# EAGLE board rc_filter_v2-ld50 (EAGLE 9.1.3), part 1 of 2
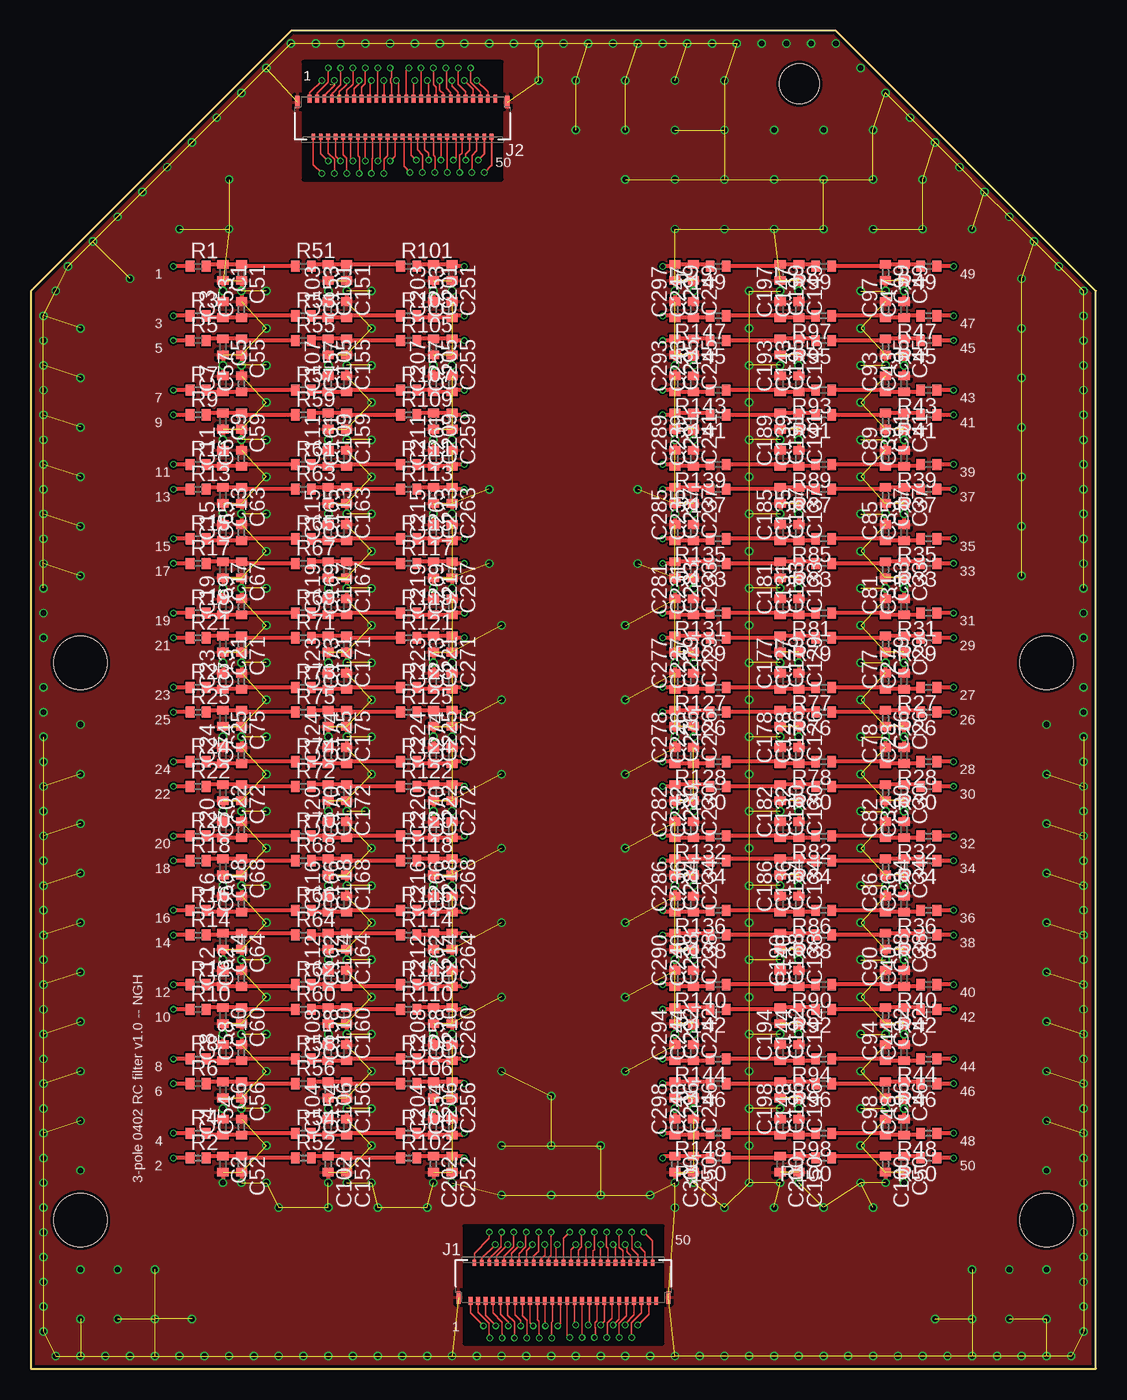
[diagram p0: board, top side]
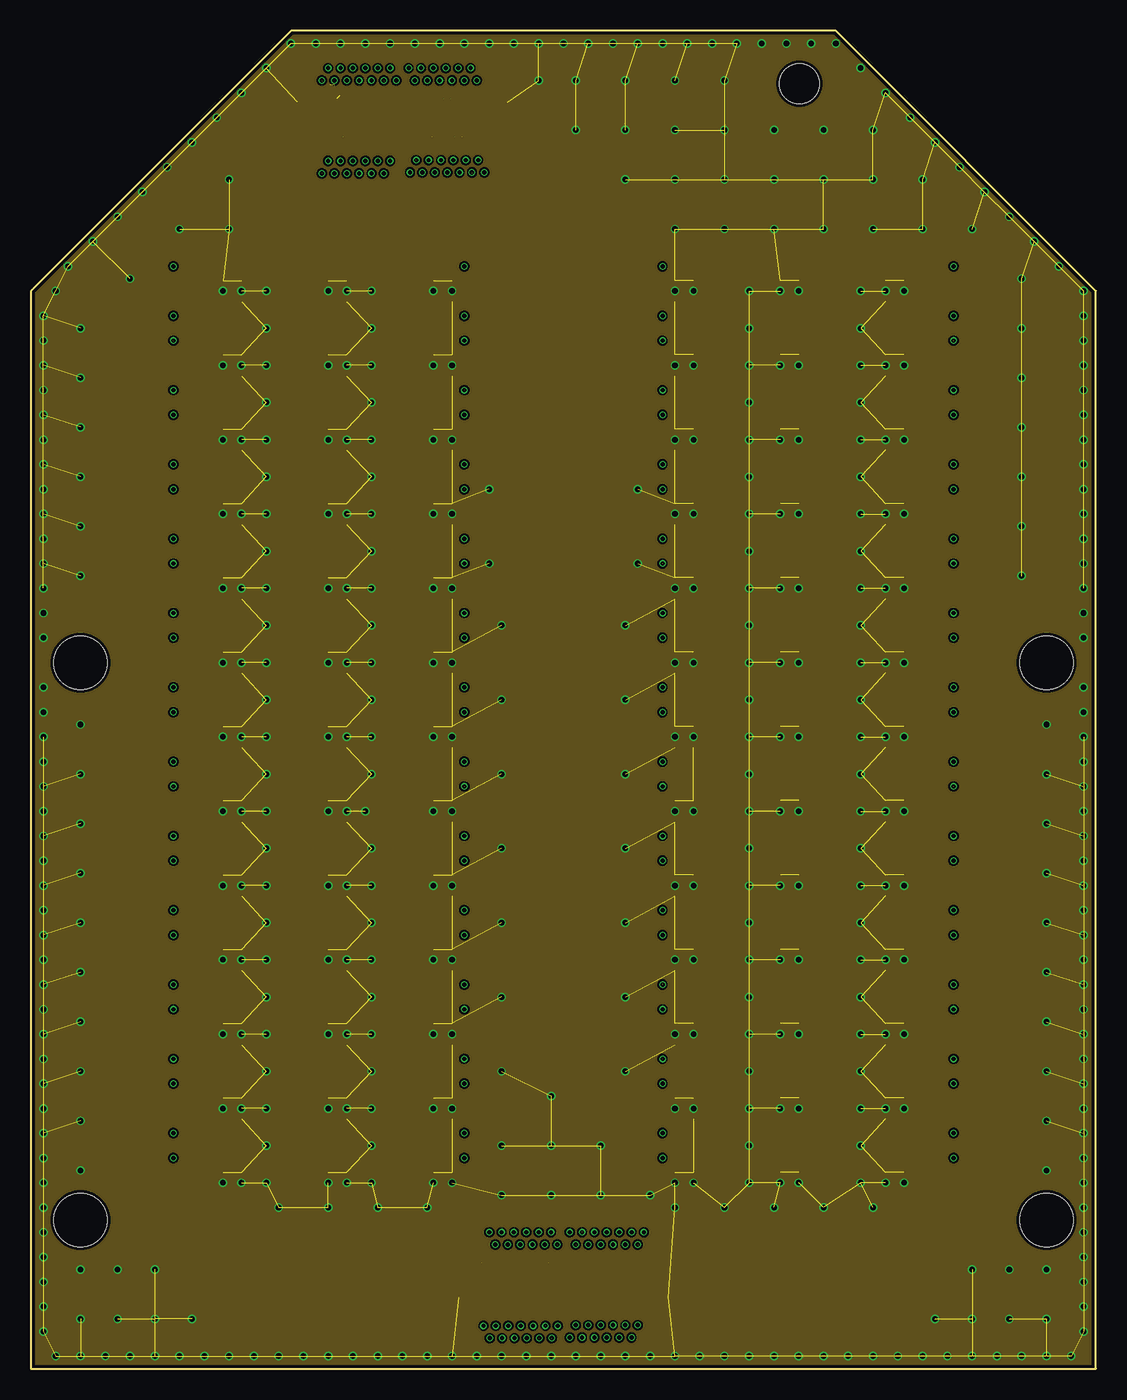
[diagram p1: board, inner layer Route2]
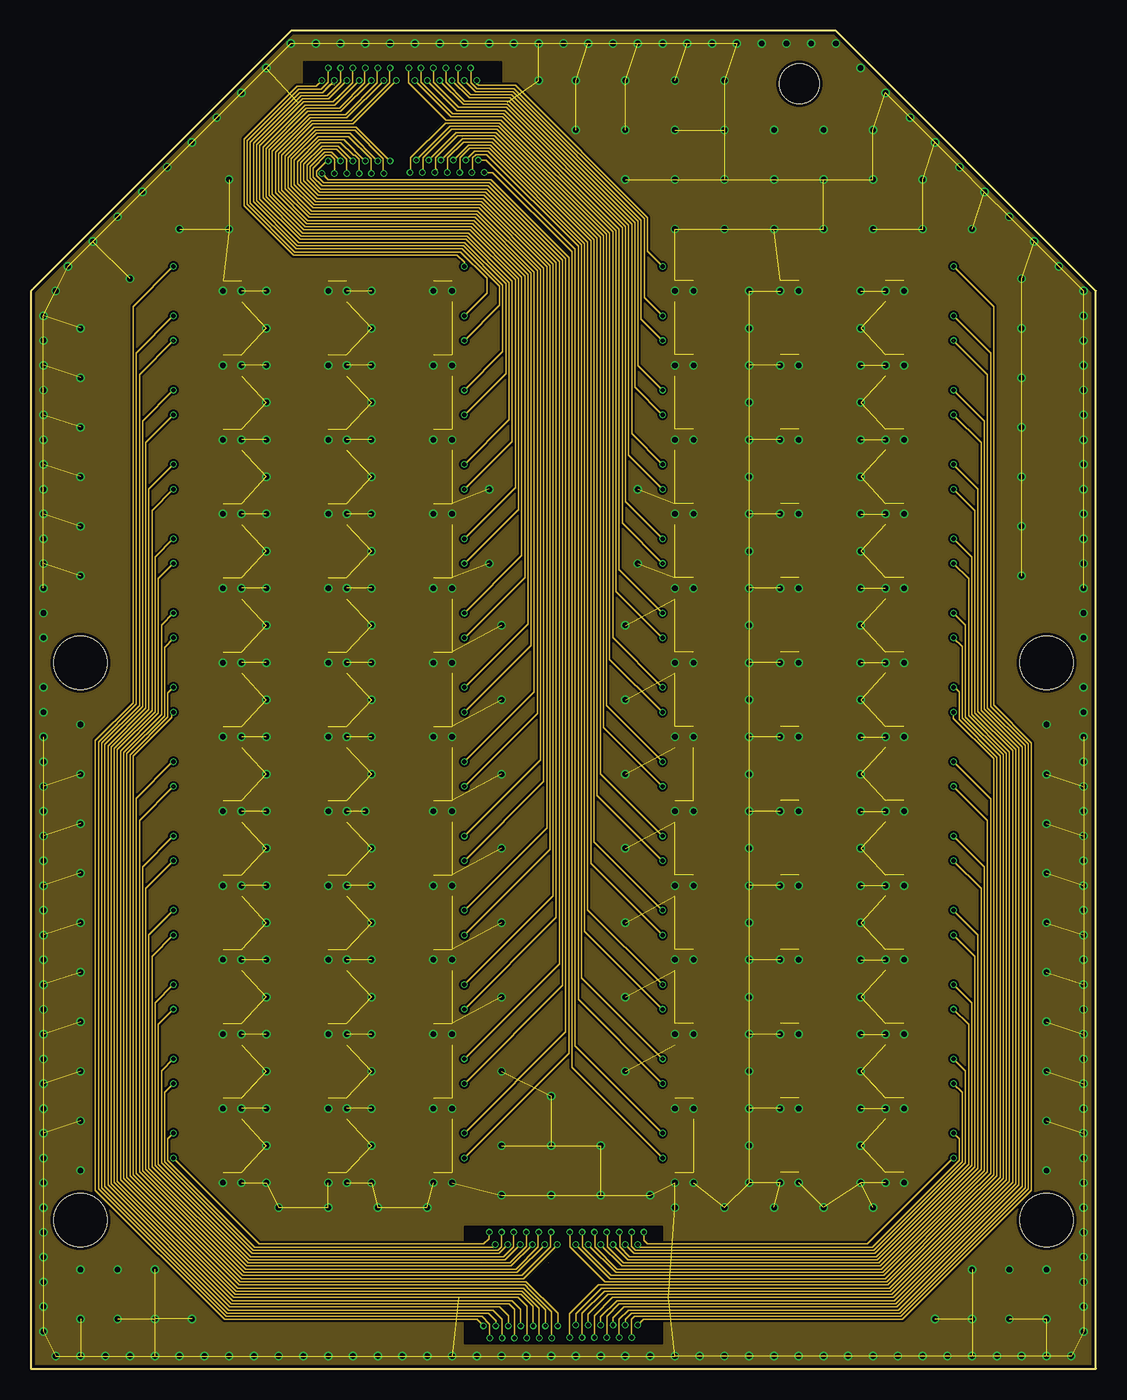
[diagram p2: board, inner layer Route15]
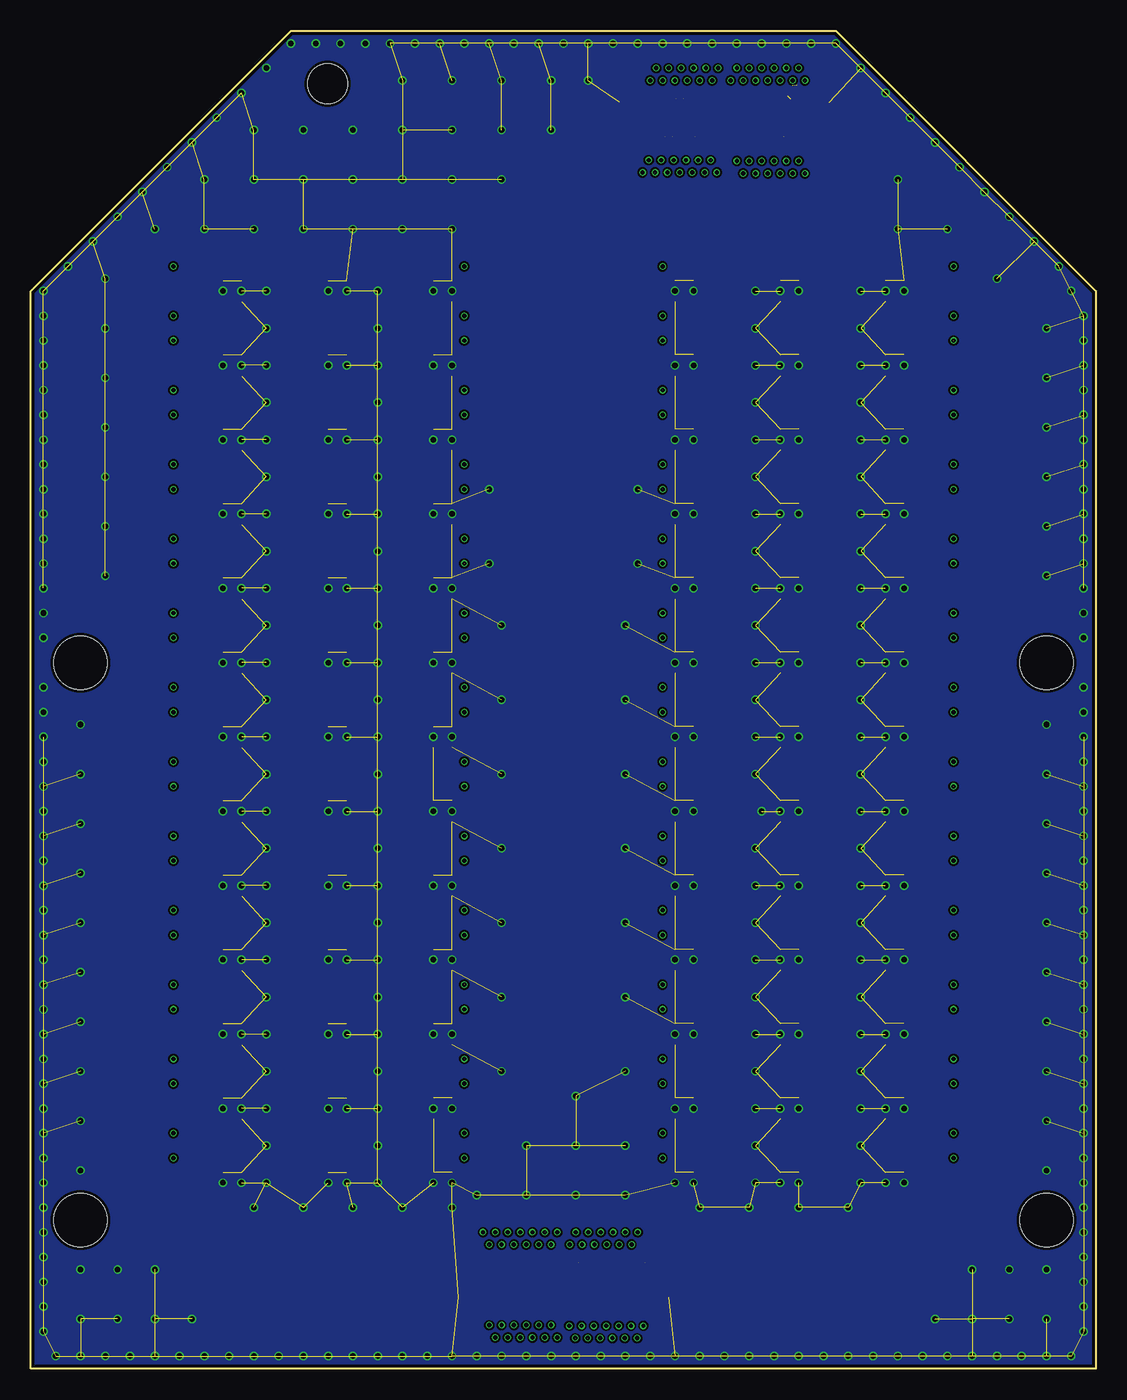
[diagram p3: board, bottom side, seen from below]

Size 86 x 108 mm. Coordinates in mm from the lower left corner, seen from the top.
Outline: 86,0 86,87 65,108 21,108 0,87 0,0 86,0
Copper layers ((1*2)+(15*16)): Top 0.048259375mm / dielectric 0.18288125mm / Route2 0.035559375mm / dielectric 39mil / Route15 0.035559375mm / dielectric 0.18288125mm / Bottom 0.048259375mm
Design rules "default *": minimum track width 5mil, minimum drill 5mil, track to track 5mil, track to pad 5mil, pad to pad 5mil, via to via 5mil, smd to smd 5mil, copper to edge 10mil, drill to drill 10mil, minimum pad ring 3mil, minimum via ring 3mil, stop-mask expansion 4mil, vias tented up to drill 16mil, thermal gap 10mil
Holes 3.2 mm at 62.05,103.75
Holes 4.3 mm at 4,12 4,57 82,57 82,12
tRestrict: area 35,2 to 51,11.5; area 22,96 to 38,105.5

## Footprints (pad centres in the part's own frame; a part is rotated, then mirrored left to right if it is on the bottom)
C0402 = smd 0.7 x 0.9: 1 -0.65,0; 2 0.65,0
MOLEX_502598-5193_0 = smd 0.3 x 0.67: 1 -7.5,-1.532; 3 -6.9,-1.532; 5 -6.3,-1.532; 7 -5.7,-1.532; 9 -5.1,-1.532; 11 -4.5,-1.532; 13 -3.9,-1.532; 15 -3.3,-1.532; 17 -2.7,-1.532; 19 -2.1,-1.532; 21 -1.5,-1.532; 23 -0.9,-1.532; 25 -0.3,-1.532; 27 0.3,-1.532; 29 0.9,-1.532; 31 1.5,-1.532; 33 2.1,-1.532; 35 2.7,-1.532; 37 3.3,-1.532; 39 3.9,-1.532; 41 4.5,-1.532; 43 5.1,-1.532; 45 5.7,-1.532; 47 6.3,-1.532; 49 6.9,-1.532; 51 7.5,-1.532 | smd 0.3 x 0.5: 2 -7.2,1.532; 4 -6.6,1.532; 6 -6,1.532; 8 -5.4,1.532; 10 -4.8,1.532; 12 -4.2,1.532; 14 -3.6,1.532; 16 -3,1.532; 18 -2.4,1.532; 20 -1.8,1.532; 22 -1.2,1.532; 24 -0.6,1.532; 26 0,1.532; 28 0.6,1.532; 30 1.2,1.532; 32 1.8,1.532; 34 2.4,1.532; 36 3,1.532; 38 3.6,1.532; 40 4.2,1.532; 42 4.8,1.532; 44 5.4,1.532; 46 6,1.532; 48 6.6,1.532; 50 7.2,1.532 | smd 0.35 x 1: MP1 -8.475,-1.267; MP2 8.475,-1.267
R0402 = smd 0.7 x 0.9: 1 -0.65,0; 2 0.65,0

## Placement (x,y rotation side)
C1  [C0402]  15.5,88.5 270 top
C2  [C0402]  15.5,16.5 270 top
C3  [C0402]  15.5,85.5 90 top
C4  [C0402]  15.5,19.5 90 top
C5  [C0402]  15.5,82.5 270 top
C6  [C0402]  15.5,22.5 270 top
C7  [C0402]  15.5,79.5 90 top
C8  [C0402]  15.5,25.5 90 top
C9  [C0402]  15.5,76.5 270 top
C10  [C0402]  15.5,28.5 270 top
C11  [C0402]  15.5,73.5 90 top
C12  [C0402]  15.5,31.5 90 top
C13  [C0402]  15.5,70.5 270 top
C14  [C0402]  15.5,34.5 270 top
C15  [C0402]  15.5,67.5 90 top
C16  [C0402]  15.5,37.5 90 top
C17  [C0402]  15.5,64.5 270 top
C18  [C0402]  15.5,40.5 270 top
C19  [C0402]  15.5,61.5 90 top
C20  [C0402]  15.5,43.5 90 top
C21  [C0402]  15.5,58.5 270 top
C22  [C0402]  15.5,46.5 270 top
C23  [C0402]  15.5,55.5 90 top
C24  [C0402]  15.5,49.5 90 top
C25  [C0402]  15.5,52.5 270 top
C26  [C0402]  70.5,52.5 270 top
C27  [C0402]  70.5,55.5 90 top
C28  [C0402]  70.5,49.5 90 top
C29  [C0402]  70.5,58.5 270 top
C30  [C0402]  70.5,46.5 270 top
C31  [C0402]  70.5,61.5 90 top
C32  [C0402]  70.5,43.5 90 top
C33  [C0402]  70.5,64.5 270 top
C34  [C0402]  70.5,40.5 270 top
C35  [C0402]  70.5,67.5 90 top
C36  [C0402]  70.5,37.5 90 top
C37  [C0402]  70.5,70.5 270 top
C38  [C0402]  70.5,34.5 270 top
C39  [C0402]  70.5,73.5 90 top
C40  [C0402]  70.5,31.5 90 top
C41  [C0402]  70.5,76.5 270 top
C42  [C0402]  70.5,28.5 270 top
C43  [C0402]  70.5,79.5 90 top
C44  [C0402]  70.5,25.5 90 top
C45  [C0402]  70.5,82.5 270 top
C46  [C0402]  70.5,22.5 270 top
C47  [C0402]  70.5,85.5 90 top
C48  [C0402]  70.5,19.5 90 top
C49  [C0402]  70.5,88.5 270 top
C50  [C0402]  70.5,16.5 270 top
C51  [C0402]  17,88.5 270 top
C52  [C0402]  17,16.5 270 top
C53  [C0402]  17,85.5 90 top
C54  [C0402]  17,19.5 90 top
C55  [C0402]  17,82.5 270 top
C56  [C0402]  17,22.5 270 top
C57  [C0402]  17,79.5 90 top
C58  [C0402]  17,25.5 90 top
C59  [C0402]  17,76.5 270 top
C60  [C0402]  17,28.5 270 top
C61  [C0402]  17,73.5 90 top
C62  [C0402]  17,31.5 90 top
C63  [C0402]  17,70.5 270 top
C64  [C0402]  17,34.5 270 top
C65  [C0402]  17,67.5 90 top
C66  [C0402]  17,37.5 90 top
C67  [C0402]  17,64.5 270 top
C68  [C0402]  17,40.5 270 top
C69  [C0402]  17,61.5 90 top
C70  [C0402]  17,43.5 90 top
C71  [C0402]  17,58.5 270 top
C72  [C0402]  17,46.5 270 top
C73  [C0402]  17,55.5 90 top
C74  [C0402]  17,49.5 90 top
C75  [C0402]  17,52.5 270 top
C76  [C0402]  69,52.5 270 top
C77  [C0402]  69,55.5 90 top
C78  [C0402]  69,49.5 90 top
C79  [C0402]  69,58.5 270 top
C80  [C0402]  69,46.5 270 top
C81  [C0402]  69,61.5 90 top
C82  [C0402]  69,43.5 90 top
C83  [C0402]  69,64.5 270 top
C84  [C0402]  69,40.5 270 top
C85  [C0402]  69,67.5 90 top
C86  [C0402]  69,37.5 90 top
C87  [C0402]  69,70.5 270 top
C88  [C0402]  69,34.5 270 top
C89  [C0402]  69,73.5 90 top
C90  [C0402]  69,31.5 90 top
C91  [C0402]  69,76.5 270 top
C92  [C0402]  69,28.5 270 top
C93  [C0402]  69,79.5 90 top
C94  [C0402]  69,25.5 90 top
C95  [C0402]  69,82.5 270 top
C96  [C0402]  69,22.5 270 top
C97  [C0402]  69,85.5 90 top
C98  [C0402]  69,19.5 90 top
C99  [C0402]  69,88.5 270 top
C100  [C0402]  69,16.5 270 top
C101  [C0402]  24,88.5 270 top
C102  [C0402]  24,16.5 270 top
C103  [C0402]  24,85.5 90 top
C104  [C0402]  24,19.5 90 top
C105  [C0402]  24,82.5 270 top
C106  [C0402]  24,22.5 270 top
C107  [C0402]  24,79.5 90 top
C108  [C0402]  24,25.5 90 top
C109  [C0402]  24,76.5 270 top
C110  [C0402]  24,28.5 270 top
C111  [C0402]  24,73.5 90 top
C112  [C0402]  24,31.5 90 top
C113  [C0402]  24,70.5 270 top
C114  [C0402]  24,34.5 270 top
C115  [C0402]  24,67.5 90 top
C116  [C0402]  24,37.5 90 top
C117  [C0402]  24,64.5 270 top
C118  [C0402]  24,40.5 270 top
C119  [C0402]  24,61.5 90 top
C120  [C0402]  24,43.5 90 top
C121  [C0402]  24,58.5 270 top
C122  [C0402]  24,46.5 270 top
C123  [C0402]  24,55.5 90 top
C124  [C0402]  24,49.5 90 top
C125  [C0402]  24,52.5 270 top
C126  [C0402]  62,52.5 270 top
C127  [C0402]  62,55.5 90 top
C128  [C0402]  62,49.5 90 top
C129  [C0402]  62,58.5 270 top
C130  [C0402]  62,46.5 270 top
C131  [C0402]  62,61.5 90 top
C132  [C0402]  62,43.5 90 top
C133  [C0402]  62,64.5 270 top
C134  [C0402]  62,40.5 270 top
C135  [C0402]  62,67.5 90 top
C136  [C0402]  62,37.5 90 top
C137  [C0402]  62,70.5 270 top
C138  [C0402]  62,34.5 270 top
C139  [C0402]  62,73.5 90 top
C140  [C0402]  62,31.5 90 top
C141  [C0402]  62,76.5 270 top
C142  [C0402]  62,28.5 270 top
C143  [C0402]  62,79.5 90 top
C144  [C0402]  62,25.5 90 top
C145  [C0402]  62,82.5 270 top
C146  [C0402]  62,22.5 270 top
C147  [C0402]  62,85.5 90 top
C148  [C0402]  62,19.5 90 top
C149  [C0402]  62,88.5 270 top
C150  [C0402]  62,16.5 270 top
C151  [C0402]  25.5,88.5 270 top
C152  [C0402]  25.5,16.5 270 top
C153  [C0402]  25.5,85.5 90 top
C154  [C0402]  25.5,19.5 90 top
C155  [C0402]  25.5,82.5 270 top
C156  [C0402]  25.5,22.5 270 top
C157  [C0402]  25.5,79.5 90 top
C158  [C0402]  25.5,25.5 90 top
C159  [C0402]  25.5,76.5 270 top
C160  [C0402]  25.5,28.5 270 top
C161  [C0402]  25.5,73.5 90 top
C162  [C0402]  25.5,31.5 90 top
C163  [C0402]  25.5,70.5 270 top
C164  [C0402]  25.5,34.5 270 top
C165  [C0402]  25.5,67.5 90 top
C166  [C0402]  25.5,37.5 90 top
C167  [C0402]  25.5,64.5 270 top
C168  [C0402]  25.5,40.5 270 top
C169  [C0402]  25.5,61.5 90 top
C170  [C0402]  25.5,43.5 90 top
C171  [C0402]  25.5,58.5 270 top
C172  [C0402]  25.5,46.5 270 top
C173  [C0402]  25.5,55.5 90 top
C174  [C0402]  25.5,49.5 90 top
C175  [C0402]  25.5,52.5 270 top
C176  [C0402]  60.5,52.5 270 top
C177  [C0402]  60.5,55.5 90 top
C178  [C0402]  60.5,49.5 90 top
C179  [C0402]  60.5,58.5 270 top
C180  [C0402]  60.5,46.5 270 top
C181  [C0402]  60.5,61.5 90 top
C182  [C0402]  60.5,43.5 90 top
C183  [C0402]  60.5,64.5 270 top
C184  [C0402]  60.5,40.5 270 top
C185  [C0402]  60.5,67.5 90 top
C186  [C0402]  60.5,37.5 90 top
C187  [C0402]  60.5,70.5 270 top
C188  [C0402]  60.5,34.5 270 top
C189  [C0402]  60.5,73.5 90 top
C190  [C0402]  60.5,31.5 90 top
C191  [C0402]  60.5,76.5 270 top
C192  [C0402]  60.5,28.5 270 top
C193  [C0402]  60.5,79.5 90 top
C194  [C0402]  60.5,25.5 90 top
C195  [C0402]  60.5,82.5 270 top
C196  [C0402]  60.5,22.5 270 top
C197  [C0402]  60.5,85.5 90 top
C198  [C0402]  60.5,19.5 90 top
C199  [C0402]  60.5,88.5 270 top
C200  [C0402]  60.5,16.5 270 top
C201  [C0402]  32.5,88.5 270 top
C202  [C0402]  32.5,16.5 270 top
C203  [C0402]  32.5,85.5 90 top
C204  [C0402]  32.5,19.5 90 top
C205  [C0402]  32.5,82.5 270 top
C206  [C0402]  32.5,22.5 270 top
C207  [C0402]  32.5,79.5 90 top
C208  [C0402]  32.5,25.5 90 top
C209  [C0402]  32.5,76.5 270 top
C210  [C0402]  32.5,28.5 270 top
C211  [C0402]  32.5,73.5 90 top
C212  [C0402]  32.5,31.5 90 top
C213  [C0402]  32.5,70.5 270 top
C214  [C0402]  32.5,34.5 270 top
C215  [C0402]  32.5,67.5 90 top
C216  [C0402]  32.5,37.5 90 top
C217  [C0402]  32.5,64.5 270 top
C218  [C0402]  32.5,40.5 270 top
C219  [C0402]  32.5,61.5 90 top
C220  [C0402]  32.5,43.5 90 top
C221  [C0402]  32.5,58.5 270 top
C222  [C0402]  32.5,46.5 270 top
C223  [C0402]  32.5,55.5 90 top
C224  [C0402]  32.5,49.5 90 top
C225  [C0402]  32.5,52.5 270 top
C226  [C0402]  53.5,52.5 270 top
C227  [C0402]  53.5,55.5 90 top
C228  [C0402]  53.5,49.5 90 top
C229  [C0402]  53.5,58.5 270 top
C230  [C0402]  53.5,46.5 270 top
C231  [C0402]  53.5,61.5 90 top
C232  [C0402]  53.5,43.5 90 top
C233  [C0402]  53.5,64.5 270 top
C234  [C0402]  53.5,40.5 270 top
C235  [C0402]  53.5,67.5 90 top
C236  [C0402]  53.5,37.5 90 top
C237  [C0402]  53.5,70.5 270 top
C238  [C0402]  53.5,34.5 270 top
C239  [C0402]  53.5,73.5 90 top
C240  [C0402]  53.5,31.5 90 top
C241  [C0402]  53.5,76.5 270 top
C242  [C0402]  53.5,28.5 270 top
C243  [C0402]  53.5,79.5 90 top
C244  [C0402]  53.5,25.5 90 top
C245  [C0402]  53.5,82.5 270 top
C246  [C0402]  53.5,22.5 270 top
C247  [C0402]  53.5,85.5 90 top
C248  [C0402]  53.5,19.5 90 top
C249  [C0402]  53.5,88.5 270 top
C250  [C0402]  53.5,16.5 270 top
C251  [C0402]  34,88.5 270 top
C252  [C0402]  34,16.5 270 top
C253  [C0402]  34,85.5 90 top
C254  [C0402]  34,19.5 90 top
C255  [C0402]  34,82.5 270 top
C256  [C0402]  34,22.5 270 top
C257  [C0402]  34,79.5 90 top
C258  [C0402]  34,25.5 90 top
C259  [C0402]  34,76.5 270 top
C260  [C0402]  34,28.5 270 top
C261  [C0402]  34,73.5 90 top
C262  [C0402]  34,31.5 90 top
C263  [C0402]  34,70.5 270 top
C264  [C0402]  34,34.5 270 top
C265  [C0402]  34,67.5 90 top
C266  [C0402]  34,37.5 90 top
C267  [C0402]  34,64.5 270 top
C268  [C0402]  34,40.5 270 top
C269  [C0402]  34,61.5 90 top
C270  [C0402]  34,43.5 90 top
C271  [C0402]  34,58.5 270 top
C272  [C0402]  34,46.5 270 top
C273  [C0402]  34,55.5 90 top
C274  [C0402]  34,49.5 90 top
C275  [C0402]  34,52.5 270 top
C276  [C0402]  52,52.5 270 top
C277  [C0402]  52,55.5 90 top
C278  [C0402]  52,49.5 90 top
C279  [C0402]  52,58.5 270 top
C280  [C0402]  52,46.5 270 top
C281  [C0402]  52,61.5 90 top
C282  [C0402]  52,43.5 90 top
C283  [C0402]  52,64.5 270 top
C284  [C0402]  52,40.5 270 top
C285  [C0402]  52,67.5 90 top
C286  [C0402]  52,37.5 90 top
C287  [C0402]  52,70.5 270 top
C288  [C0402]  52,34.5 270 top
C289  [C0402]  52,73.5 90 top
C290  [C0402]  52,31.5 90 top
C291  [C0402]  52,76.5 270 top
C292  [C0402]  52,28.5 270 top
C293  [C0402]  52,79.5 90 top
C294  [C0402]  52,25.5 90 top
C295  [C0402]  52,82.5 270 top
C296  [C0402]  52,22.5 270 top
C297  [C0402]  52,85.5 90 top
C298  [C0402]  52,19.5 90 top
C299  [C0402]  52,88.5 270 top
C300  [C0402]  52,16.5 270 top
J1  MOLEX_502598-5193MOLEX_502598-5193_0_0  [MOLEX_502598-5193_0]  43,7 0 top
J2  MOLEX_502598-5193MOLEX_502598-5193_0_0  [MOLEX_502598-5193_0]  30,101 180 top
R1  [R0402]  13.5,89 0 top
R2  [R0402]  13.5,17 0 top
R3  [R0402]  13.5,85 0 top
R4  [R0402]  13.5,19 0 top
R5  [R0402]  13.5,83 0 top
R6  [R0402]  13.5,23 0 top
R7  [R0402]  13.5,79 0 top
R8  [R0402]  13.5,25 0 top
R9  [R0402]  13.5,77 0 top
R10  [R0402]  13.5,29 0 top
R11  [R0402]  13.5,73 0 top
R12  [R0402]  13.5,31 0 top
R13  [R0402]  13.5,71 0 top
R14  [R0402]  13.5,35 0 top
R15  [R0402]  13.5,67 0 top
R16  [R0402]  13.5,37 0 top
R17  [R0402]  13.5,65 0 top
R18  [R0402]  13.5,41 0 top
R19  [R0402]  13.5,61 0 top
R20  [R0402]  13.5,43 0 top
R21  [R0402]  13.5,59 0 top
R22  [R0402]  13.5,47 0 top
R23  [R0402]  13.5,55 0 top
R24  [R0402]  13.5,49 0 top
R25  [R0402]  13.5,53 0 top
R26  [R0402]  72.5,53 180 top
R27  [R0402]  72.5,55 180 top
R28  [R0402]  72.5,49 180 top
R29  [R0402]  72.5,59 180 top
R30  [R0402]  72.5,47 180 top
R31  [R0402]  72.5,61 180 top
R32  [R0402]  72.5,43 180 top
R33  [R0402]  72.5,65 180 top
R34  [R0402]  72.5,41 180 top
R35  [R0402]  72.5,67 180 top
R36  [R0402]  72.5,37 180 top
R37  [R0402]  72.5,71 180 top
R38  [R0402]  72.5,35 180 top
R39  [R0402]  72.5,73 180 top
R40  [R0402]  72.5,31 180 top
R41  [R0402]  72.5,77 180 top
R42  [R0402]  72.5,29 180 top
R43  [R0402]  72.5,79 180 top
R44  [R0402]  72.5,25 180 top
R45  [R0402]  72.5,83 180 top
R46  [R0402]  72.5,23 180 top
R47  [R0402]  72.5,85 180 top
R48  [R0402]  72.5,19 180 top
R49  [R0402]  72.5,89 180 top
R50  [R0402]  72.5,17 180 top
R51  [R0402]  22,89 0 top
R52  [R0402]  22,17 0 top
R53  [R0402]  22,85 0 top
R54  [R0402]  22,19 0 top
R55  [R0402]  22,83 0 top
R56  [R0402]  22,23 0 top
R57  [R0402]  22,79 0 top
R58  [R0402]  22,25 0 top
R59  [R0402]  22,77 0 top
R60  [R0402]  22,29 0 top
R61  [R0402]  22,73 0 top
R62  [R0402]  22,31 0 top
R63  [R0402]  22,71 0 top
R64  [R0402]  22,35 0 top
R65  [R0402]  22,67 0 top
R66  [R0402]  22,37 0 top
R67  [R0402]  22,65 0 top
R68  [R0402]  22,41 0 top
R69  [R0402]  22,61 0 top
R70  [R0402]  22,43 0 top
R71  [R0402]  22,59 0 top
R72  [R0402]  22,47 0 top
R73  [R0402]  22,55 0 top
R74  [R0402]  22,49 0 top
R75  [R0402]  22,53 0 top
R76  [R0402]  64,53 180 top
R77  [R0402]  64,55 180 top
R78  [R0402]  64,49 180 top
R79  [R0402]  64,59 180 top
R80  [R0402]  64,47 180 top
R81  [R0402]  64,61 180 top
R82  [R0402]  64,43 180 top
R83  [R0402]  64,65 180 top
R84  [R0402]  64,41 180 top
R85  [R0402]  64,67 180 top
R86  [R0402]  64,37 180 top
R87  [R0402]  64,71 180 top
R88  [R0402]  64,35 180 top
R89  [R0402]  64,73 180 top
R90  [R0402]  64,31 180 top
R91  [R0402]  64,77 180 top
R92  [R0402]  64,29 180 top
R93  [R0402]  64,79 180 top
R94  [R0402]  64,25 180 top
R95  [R0402]  64,83 180 top
R96  [R0402]  64,23 180 top
R97  [R0402]  64,85 180 top
R98  [R0402]  64,19 180 top
R99  [R0402]  64,89 180 top
R100  [R0402]  64,17 180 top
R101  [R0402]  30.5,89 0 top
R102  [R0402]  30.5,17 0 top
R103  [R0402]  30.5,85 0 top
R104  [R0402]  30.5,19 0 top
R105  [R0402]  30.5,83 0 top
R106  [R0402]  30.5,23 0 top
R107  [R0402]  30.5,79 0 top
R108  [R0402]  30.5,25 0 top
R109  [R0402]  30.5,77 0 top
R110  [R0402]  30.5,29 0 top
R111  [R0402]  30.5,73 0 top
R112  [R0402]  30.5,31 0 top
R113  [R0402]  30.5,71 0 top
R114  [R0402]  30.5,35 0 top
R115  [R0402]  30.5,67 0 top
R116  [R0402]  30.5,37 0 top
R117  [R0402]  30.5,65 0 top
R118  [R0402]  30.5,41 0 top
R119  [R0402]  30.5,61 0 top
R120  [R0402]  30.5,43 0 top
R121  [R0402]  30.5,59 0 top
R122  [R0402]  30.5,47 0 top
R123  [R0402]  30.5,55 0 top
R124  [R0402]  30.5,49 0 top
R125  [R0402]  30.5,53 0 top
R126  [R0402]  55.5,53 180 top
R127  [R0402]  55.5,55 180 top
R128  [R0402]  55.5,49 180 top
R129  [R0402]  55.5,59 180 top
R130  [R0402]  55.5,47 180 top
R131  [R0402]  55.5,61 180 top
R132  [R0402]  55.5,43 180 top
R133  [R0402]  55.5,65 180 top
R134  [R0402]  55.5,41 180 top
R135  [R0402]  55.5,67 180 top
R136  [R0402]  55.5,37 180 top
R137  [R0402]  55.5,71 180 top
R138  [R0402]  55.5,35 180 top
R139  [R0402]  55.5,73 180 top
R140  [R0402]  55.5,31 180 top
R141  [R0402]  55.5,77 180 top
R142  [R0402]  55.5,29 180 top
R143  [R0402]  55.5,79 180 top
R144  [R0402]  55.5,25 180 top
R145  [R0402]  55.5,83 180 top
R146  [R0402]  55.5,23 180 top
R147  [R0402]  55.5,85 180 top
R148  [R0402]  55.5,19 180 top
R149  [R0402]  55.5,89 180 top
R150  [R0402]  55.5,17 180 top

## Library data of the parts
C1-C300 R1-R150 = resistor
J1 J2 = Molex - 502598-5193; CIIVA_IDS: 8412513; CIRCUITS_LOADED: 51; COMPONENT_LINK_1_DESCRIPTION: Manufacturer URL; COMPONENT_LINK_1_URL: http://www.molex.com/molex/index.jsp; COMPONENT_LINK_3_DESCRIPTION: Package Specification; COMPONENT_LINK_3_URL: http://www.molex.com/pdm_docs/sd/5025985193_sd.pdf; CONTACT_POSITION: Dual; CURRENT_MAX_PER_CONTACT: 0.2A; DATASHEET: http://www.molex.com/webdocs/datasheets/pdf/en-us/5025985193_FFC_FPC_CONNECTORS.pdf; DURABILITY_MATING_CYCLES_MAX: 10; ENTRY_ANGLE: 90degrees Angle; FOOTPRINT_VARIANT_NAME_0: Manufacturer Recommended; IMPORTED: yes; IMPORTED_FROM: vault; IMPORT_TS: 1521860080; MATED_HEIGHT: 1.15mm; MATERIAL___METAL: Copper Alloy, Phosphor Bronze; MATERIAL___PLATING_MATING: Gold; MATERIAL___PLATING_TERMINATION: Gold, Tin; MF: Molex; MOUNTING_TECHNOLOGY: Surface Mount; MPN: 502598-5193; NUMBER_OF_ROWS: 1; ORIENTATION: Right Angle; PACKAGE: 502598-5193; PACKAGE_DESCRIPTION: 51-Lead FPC Connector, Pitch 0.3 mm; PACKAGE_VERSION: Rev. B, 08/2013; PACKING: Tape and Reel; PCB_LOCATOR: No; PCB_RETENTION: Yes; PITCH___MATING_INTERFACE: 0.30mm; POLARIZED_TO_PCB: Yes; PREFIX: J; RELEASE_DATE: 1411372322; ROHS: Yes; STACKABLE: No; VAULT_GUID: 79943B7E-3FDB-4B6C-B1B1-74E826A886CC; VAULT_REVISION: 2B392736-9C86-4257-9195-559BF0CEA94B; VOLTAGE_MAX: 50V AC (RMS)/DC

## Nets
F1: J1.1 R1.1
F2: J1.2 R2.1
F3: J1.3 R3.1
F4: J1.4 R4.1
F5: J1.5 R5.1
F6: J1.6 R6.1
F7: J1.7 R7.1
F8: J1.8 R8.1
F9: J1.9 R9.1
F10: J1.10 R10.1
F11: J1.11 R11.1
F12: J1.12 R12.1
F13: J1.13 R13.1
F14: J1.14 R14.1
F15: J1.15 R15.1
F16: J1.16 R16.1
F17: J1.17 R17.1
F18: J1.18 R18.1
F19: J1.19 R19.1
F20: J1.20 R20.1
F21: J1.21 R21.1
F22: J1.22 R22.1
F23: J1.23 R23.1
F24: J1.24 R24.1
F25: J1.25 R25.1
F26: J1.26 R26.1
F27: J1.27 R27.1
F28: J1.28 R28.1
F29: J1.29 R29.1
F30: J1.30 R30.1
F31: J1.31 R31.1
F32: J1.32 R32.1
F33: J1.33 R33.1
F34: J1.34 R34.1
F35: J1.35 R35.1
F36: J1.36 R36.1
F37: J1.37 R37.1
F38: J1.38 R38.1
F39: J1.39 R39.1
F40: J1.40 R40.1
F41: J1.41 R41.1
F42: J1.42 R42.1
F43: J1.43 R43.1
F44: J1.44 R44.1
F45: J1.45 R45.1
F46: J1.46 R46.1
F47: J1.47 R47.1
F48: J1.48 R48.1
F49: J1.49 R49.1
F50: J1.50 R50.1
G1: C201.1 C251.1 J2.51 R101.2
G2: C202.1 C252.1 J2.50 R102.2
G3: C203.1 C253.1 J2.49 R103.2
G4: C204.1 C254.1 J2.48 R104.2
G5: C205.1 C255.1 J2.47 R105.2
G6: C206.1 C256.1 J2.46 R106.2
G7: C207.1 C257.1 J2.45 R107.2
G8: C208.1 C258.1 J2.44 R108.2
G9: C209.1 C259.1 J2.43 R109.2
G10: C210.1 C260.1 J2.42 R110.2
G11: C211.1 C261.1 J2.41 R111.2
G12: C212.1 C262.1 J2.40 R112.2
G13: C213.1 C263.1 J2.39 R113.2
G14: C214.1 C264.1 J2.38 R114.2
G15: C215.1 C265.1 J2.37 R115.2
G16: C216.1 C266.1 J2.36 R116.2
G17: C217.1 C267.1 J2.35 R117.2
G18: C218.1 C268.1 J2.34 R118.2
G19: C219.1 C269.1 J2.33 R119.2
G20: C220.1 C270.1 J2.32 R120.2
G21: C221.1 C271.1 J2.31 R121.2
G22: C222.1 C272.1 J2.30 R122.2
G23: C223.1 C273.1 J2.29 R123.2
G24: C224.1 C274.1 J2.28 R124.2
G25: C225.1 C275.1 J2.27 R125.2
G26: C226.1 C276.1 J2.26 R126.2
G27: C227.1 C277.1 J2.25 R127.2
G28: C228.1 C278.1 J2.24 R128.2
G29: C229.1 C279.1 J2.23 R129.2
G30: C230.1 C280.1 J2.22 R130.2
G31: C231.1 C281.1 J2.21 R131.2
G32: C232.1 C282.1 J2.20 R132.2
G33: C233.1 C283.1 J2.19 R133.2
G34: C234.1 C284.1 J2.18 R134.2
G35: C235.1 C285.1 J2.17 R135.2
G36: C236.1 C286.1 J2.16 R136.2
G37: C237.1 C287.1 J2.15 R137.2
G38: C238.1 C288.1 J2.14 R138.2
G39: C239.1 C289.1 J2.13 R139.2
G40: C240.1 C290.1 J2.12 R140.2
G41: C241.1 C291.1 J2.11 R141.2
G42: C242.1 C292.1 J2.10 R142.2
G43: C243.1 C293.1 J2.9 R143.2
G44: C244.1 C294.1 J2.8 R144.2
G45: C245.1 C295.1 J2.7 R145.2
G46: C246.1 C296.1 J2.6 R146.2
G47: C247.1 C297.1 J2.5 R147.2
G48: C248.1 C298.1 J2.4 R148.2
G49: C249.1 C299.1 J2.3 R149.2
G50: C250.1 C300.1 J2.2 R150.2
GND: C1.2 C2.2 C3.2 C4.2 C5.2 C6.2 C7.2 C8.2 C9.2 C10.2 C11.2 C12.2 C13.2 C14.2 C15.2 C16.2 C17.2 C18.2 C19.2 C20.2 C21.2 C22.2 C23.2 C24.2 C25.2 C26.2 C27.2 C28.2 C29.2 C30.2 C31.2 C32.2 C33.2 C34.2 C35.2 C36.2 C37.2 C38.2 C39.2 C40.2 C41.2 C42.2 C43.2 C44.2 C45.2 C46.2 C47.2 C48.2 C49.2 C50.2 C51.2 C52.2 C53.2 C54.2 C55.2 C56.2 C57.2 C58.2 C59.2 C60.2 C61.2 C62.2 C63.2 C64.2 C65.2 C66.2 C67.2 C68.2 C69.2 C70.2 C71.2 C72.2 C73.2 C74.2 C75.2 C76.2 C77.2 C78.2 C79.2 C80.2 C81.2 C82.2 C83.2 C84.2 C85.2 C86.2 C87.2 C88.2 C89.2 C90.2 C91.2 C92.2 C93.2 C94.2 C95.2 C96.2 C97.2 C98.2 C99.2 C100.2 C101.2 C102.2 C103.2 C104.2 C105.2 C106.2 C107.2 C108.2 C109.2 C110.2 C111.2 C112.2 C113.2 C114.2 C115.2 C116.2 C117.2 C118.2 C119.2 C120.2 C121.2 C122.2 C123.2 C124.2 C125.2 C126.2 C127.2 C128.2 C129.2 C130.2 C131.2 C132.2 C133.2 C134.2 C135.2 C136.2 C137.2 C138.2 C139.2 C140.2 C141.2 C142.2 C143.2 C144.2 C145.2 C146.2 C147.2 C148.2 C149.2 C150.2 C151.2 C152.2 C153.2 C154.2 C155.2 C156.2 C157.2 C158.2 C159.2 C160.2 C161.2 C162.2 C163.2 C164.2 C165.2 C166.2 C167.2 C168.2 C169.2 C170.2 C171.2 C172.2 C173.2 C174.2 C175.2 C176.2 C177.2 C178.2 C179.2 C180.2 C181.2 C182.2 C183.2 C184.2 C185.2 C186.2 C187.2 C188.2 C189.2 C190.2 C191.2 C192.2 C193.2 C194.2 C195.2 C196.2 C197.2 C198.2 C199.2 C200.2 C201.2 C202.2 C203.2 C204.2 C205.2 C206.2 C207.2 C208.2 C209.2 C210.2 C211.2 C212.2 C213.2 C214.2 C215.2 C216.2 C217.2 C218.2 C219.2 C220.2 C221.2 C222.2 C223.2 C224.2 C225.2 C226.2 C227.2 C228.2 C229.2 C230.2 C231.2 C232.2 C233.2 C234.2 C235.2 C236.2 C237.2 C238.2 C239.2 C240.2 C241.2 C242.2 C243.2 C244.2 C245.2 C246.2 C247.2 C248.2 C249.2 C250.2 C251.2 C252.2 C253.2 C254.2 C255.2 C256.2 C257.2 C258.2 C259.2 C260.2 C261.2 C262.2 C263.2 C264.2 C265.2 C266.2 C267.2 C268.2 C269.2 C270.2 C271.2 C272.2 C273.2 C274.2 C275.2 C276.2 C277.2 C278.2 C279.2 C280.2 C281.2 C282.2 C283.2 C284.2 C285.2 C286.2 C287.2 C288.2 C289.2 C290.2 C291.2 C292.2 C293.2 C294.2 C295.2 C296.2 C297.2 C298.2 C299.2 C300.2 J1.MP1 J1.MP2 J2.MP1 J2.MP2
N$1: C4.1 C54.1 R4.2 R54.1
N$2: C104.1 C154.1 R54.2 R104.1
N$7: C3.1 C53.1 R3.2 R53.1
N$8: C103.1 C153.1 R53.2 R103.1
N$12: C6.1 C56.1 R6.2 R56.1
N$14: C106.1 C156.1 R56.2 R106.1
N$18: C5.1 C55.1 R5.2 R55.1
N$19: C105.1 C155.1 R55.2 R105.1
N$24: C8.1 C58.1 R8.2 R58.1
N$26: C108.1 C158.1 R58.2 R108.1
N$30: C7.1 C57.1 R7.2 R57.1
N$32: C107.1 C157.1 R57.2 R107.1
N$36: C10.1 C60.1 R10.2 R60.1
N$38: C110.1 C160.1 R60.2 R110.1
N$43: C9.1 C59.1 R9.2 R59.1
N$44: C109.1 C159.1 R59.2 R109.1
N$46: C2.1 C52.1 R2.2 R52.1
N$47: C102.1 C152.1 R52.2 R102.1
N$53: C1.1 C51.1 R1.2 R51.1
N$54: C101.1 C151.1 R51.2 R101.1
N$66: C12.1 C62.1 R12.2 R62.1
N$67: C112.1 C162.1 R62.2 R112.1
N$70: C11.1 C61.1 R11.2 R61.1
N$71: C111.1 C161.1 R61.2 R111.1
N$74: C14.1 C64.1 R14.2 R64.1
N$75: C114.1 C164.1 R64.2 R114.1
N$78: C13.1 C63.1 R13.2 R63.1
N$79: C113.1 C163.1 R63.2 R113.1
N$82: C16.1 C66.1 R16.2 R66.1
N$83: C116.1 C166.1 R66.2 R116.1
N$86: C15.1 C65.1 R15.2 R65.1
N$87: C115.1 C165.1 R65.2 R115.1
N$90: C18.1 C68.1 R18.2 R68.1
N$91: C118.1 C168.1 R68.2 R118.1
N$94: C17.1 C67.1 R17.2 R67.1
N$95: C117.1 C167.1 R67.2 R117.1
N$98: C20.1 C70.1 R20.2 R70.1
N$99: C120.1 C170.1 R70.2 R120.1
N$102: C19.1 C69.1 R19.2 R69.1
N$103: C119.1 C169.1 R69.2 R119.1
N$106: C42.1 C92.1 R42.2 R92.1
N$107: C142.1 C192.1 R92.2 R142.1
N$110: C41.1 C91.1 R41.2 R91.1
N$111: C141.1 C191.1 R91.2 R141.1
N$114: C44.1 C94.1 R44.2 R94.1
N$115: C144.1 C194.1 R94.2 R144.1
N$118: C43.1 C93.1 R43.2 R93.1
N$119: C143.1 C193.1 R93.2 R143.1
N$122: C46.1 C96.1 R46.2 R96.1
N$123: C146.1 C196.1 R96.2 R146.1
N$126: C45.1 C95.1 R45.2 R95.1
N$127: C145.1 C195.1 R95.2 R145.1
N$130: C48.1 C98.1 R48.2 R98.1
N$131: C148.1 C198.1 R98.2 R148.1
N$134: C47.1 C97.1 R47.2 R97.1
N$135: C147.1 C197.1 R97.2 R147.1
N$138: C50.1 C100.1 R50.2 R100.1
N$139: C150.1 C200.1 R100.2 R150.1
N$142: C49.1 C99.1 R49.2 R99.1
N$143: C149.1 C199.1 R99.2 R149.1
N$146: C32.1 C82.1 R32.2 R82.1
N$147: C132.1 C182.1 R82.2 R132.1
N$150: C31.1 C81.1 R31.2 R81.1
N$151: C131.1 C181.1 R81.2 R131.1
N$154: C34.1 C84.1 R34.2 R84.1
N$155: C134.1 C184.1 R84.2 R134.1
N$160: C33.1 C83.1 R33.2 R83.1
N$161: C133.1 C183.1 R83.2 R133.1
N$164: C36.1 C86.1 R36.2 R86.1
N$165: C136.1 C186.1 R86.2 R136.1
N$168: C35.1 C85.1 R35.2 R85.1
N$169: C135.1 C185.1 R85.2 R135.1
N$172: C38.1 C88.1 R38.2 R88.1
N$173: C138.1 C188.1 R88.2 R138.1
N$176: C37.1 C87.1 R37.2 R87.1
N$177: C137.1 C187.1 R87.2 R137.1
N$180: C40.1 C90.1 R40.2 R90.1
N$181: C140.1 C190.1 R90.2 R140.1
N$184: C39.1 C89.1 R39.2 R89.1
N$185: C139.1 C189.1 R89.2 R139.1
N$188: C22.1 C72.1 R22.2 R72.1
N$189: C122.1 C172.1 R72.2 R122.1
N$192: C21.1 C71.1 R21.2 R71.1
N$193: C121.1 C171.1 R71.2 R121.1
N$196: C24.1 C74.1 R24.2 R74.1
N$197: C124.1 C174.1 R74.2 R124.1
N$200: C23.1 C73.1 R23.2 R73.1
N$201: C123.1 C173.1 R73.2 R123.1
N$204: C26.1 C76.1 R26.2 R76.1
N$205: C126.1 C176.1 R76.2 R126.1
N$208: C25.1 C75.1 R25.2 R75.1
N$209: C125.1 C175.1 R75.2 R125.1
N$212: C28.1 C78.1 R28.2 R78.1
N$213: C128.1 C178.1 R78.2 R128.1
N$216: C27.1 C77.1 R27.2 R77.1
N$217: C127.1 C177.1 R77.2 R127.1
N$220: C30.1 C80.1 R30.2 R80.1
N$221: C130.1 C180.1 R80.2 R130.1
N$224: C29.1 C79.1 R29.2 R79.1
N$225: C129.1 C179.1 R79.2 R129.1